# EAGLE board nixie-tube-clock_touch-sensor (EAGLE 9.6.2)
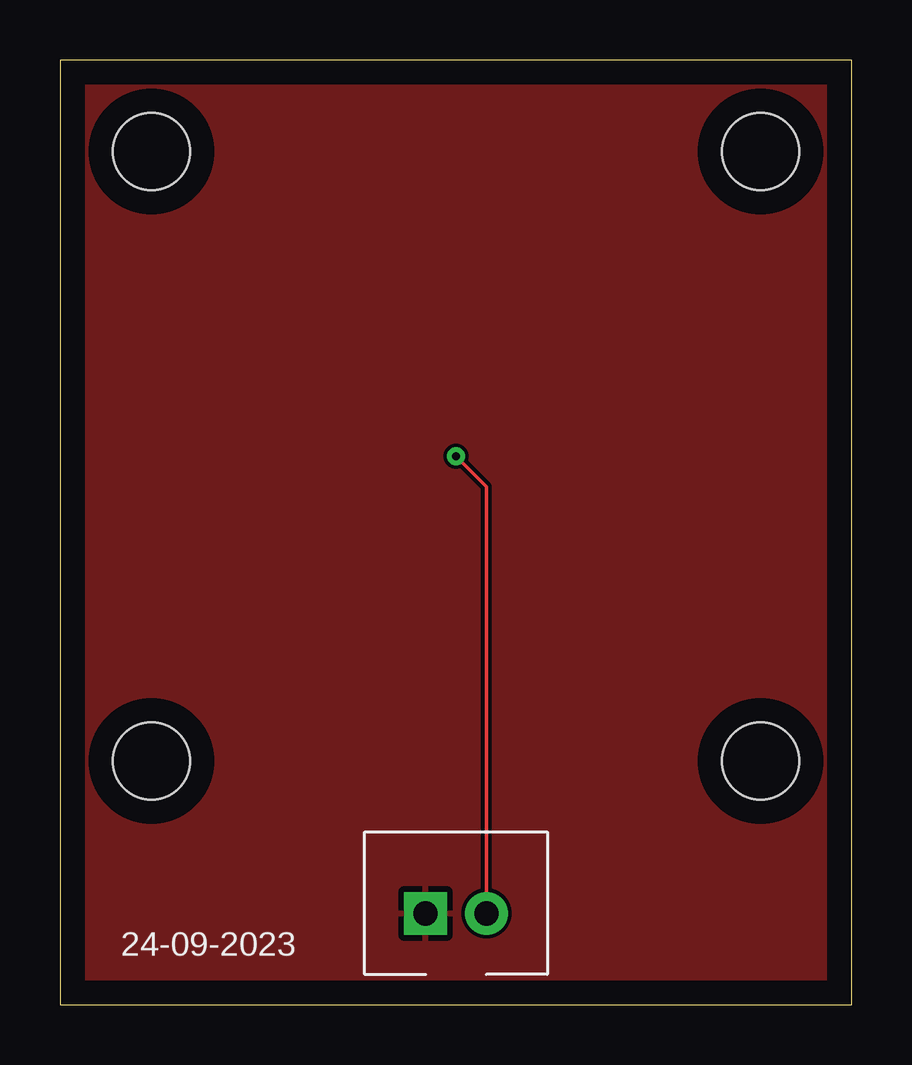
[diagram p0: board, top side]
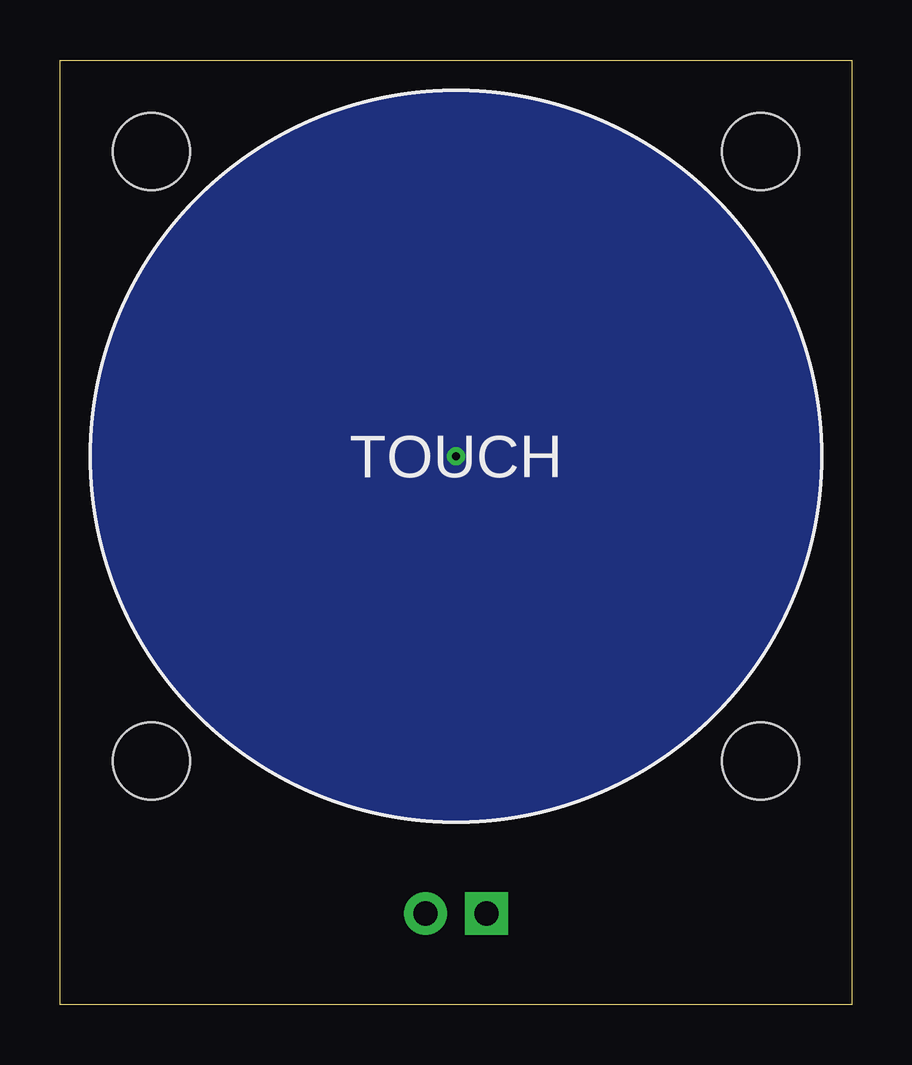
[diagram p1: board, bottom side, seen from below]

Size 33.02 x 39.37 mm. Coordinates in mm from the lower left corner, seen from the top.
Outline: 0,0 33.02,0 33.02,39.37 0,39.37 0,0
Copper layers (1*16): Top 0.035mm / dielectric 1.5mm / Bottom 0.035mm
Design rules "default *": minimum track width 6mil, minimum drill 0.35mm, track to track 6mil, track to pad 6mil, pad to pad 6mil, via to via 6mil, smd to smd 6mil, copper to edge 40mil, drill to drill 6mil, minimum pad ring 10mil, minimum via ring 8mil, stop-mask expansion 4mil, vias tented up to drill 0mil, thermal gap 10mil
Holes 3.2 mm at 3.81,35.56 29.21,35.56 29.21,10.16 3.81,10.16

## Footprints (pad centres in the part's own frame; a part is rotated, then mirrored left to right if it is on the bottom)
XH2.54_2-PIN = drill 1.016 pad 1.778 square: 1 -1.27,0 | drill 1.016 pad 1.778: 2 1.27,0

## Placement (x,y rotation side)
P1  [XH2.54_2-PIN]  16.51,3.81 0 top
SCHEMATIC1  24-09-2023  [SHEET]  2.54,3.81 0 top

## Library data of the parts
P1 SCHEMATIC1 = myLibrary

## Nets
ANT: P1.2
GND: P1.1

## Tracks (layer width: path | path; a pad name or v marks a point on that pad's centre or on a via)
ANT  (via drill 0.35)
  Top 0.152: P1.2 17.78,21.59 v16.51,22.86
  pour Bottom: 1.27,22.86 arc90 16.51,7.62 arc90 31.75,22.86 arc90 16.51,38.1 arc90
GND
  pour Top: -1.27,-1.27 -1.27,40.64 34.29,40.64 34.29,-1.27

## Text on the board
bPlace: TOUCH